# EAGLE board PCB v13 (EAGLE 9.7.0)
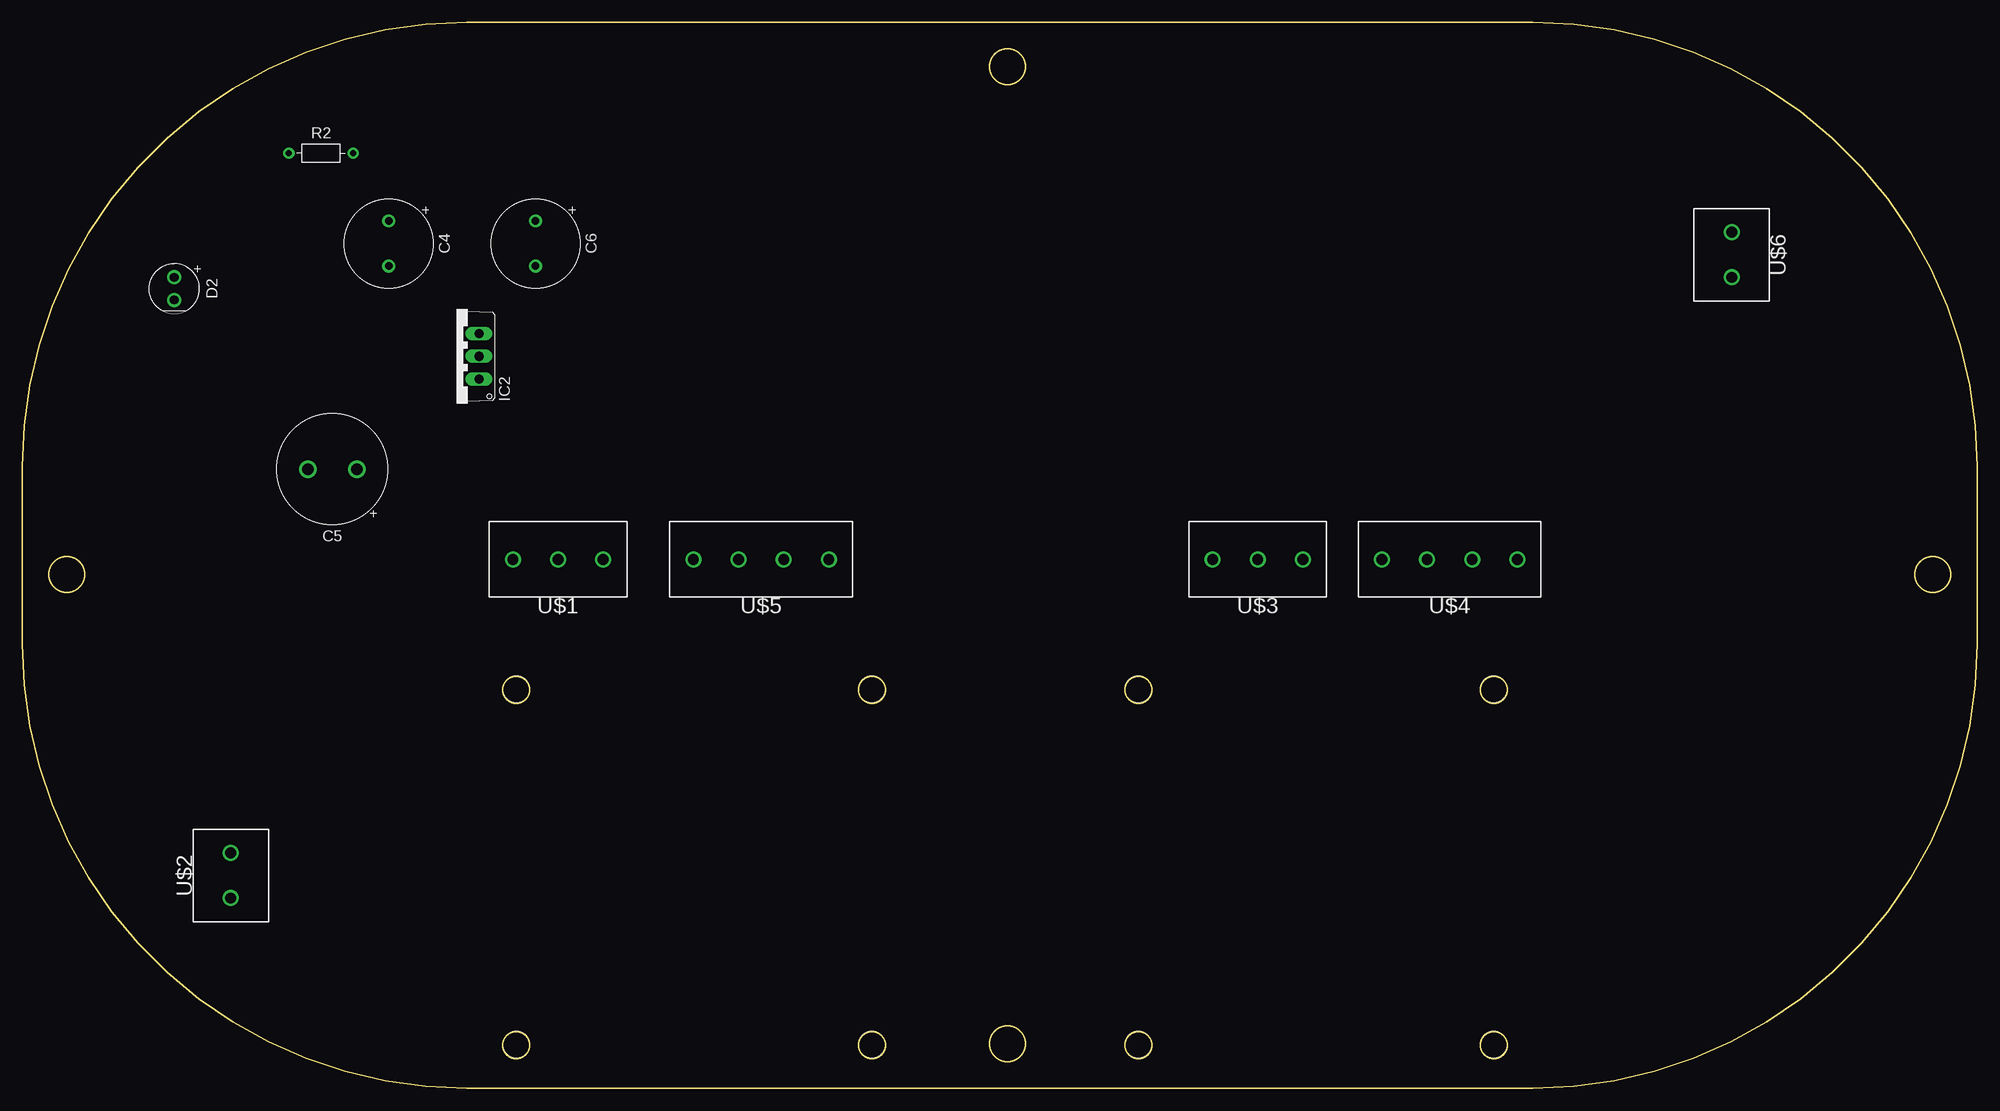
[diagram p0: board, top side]
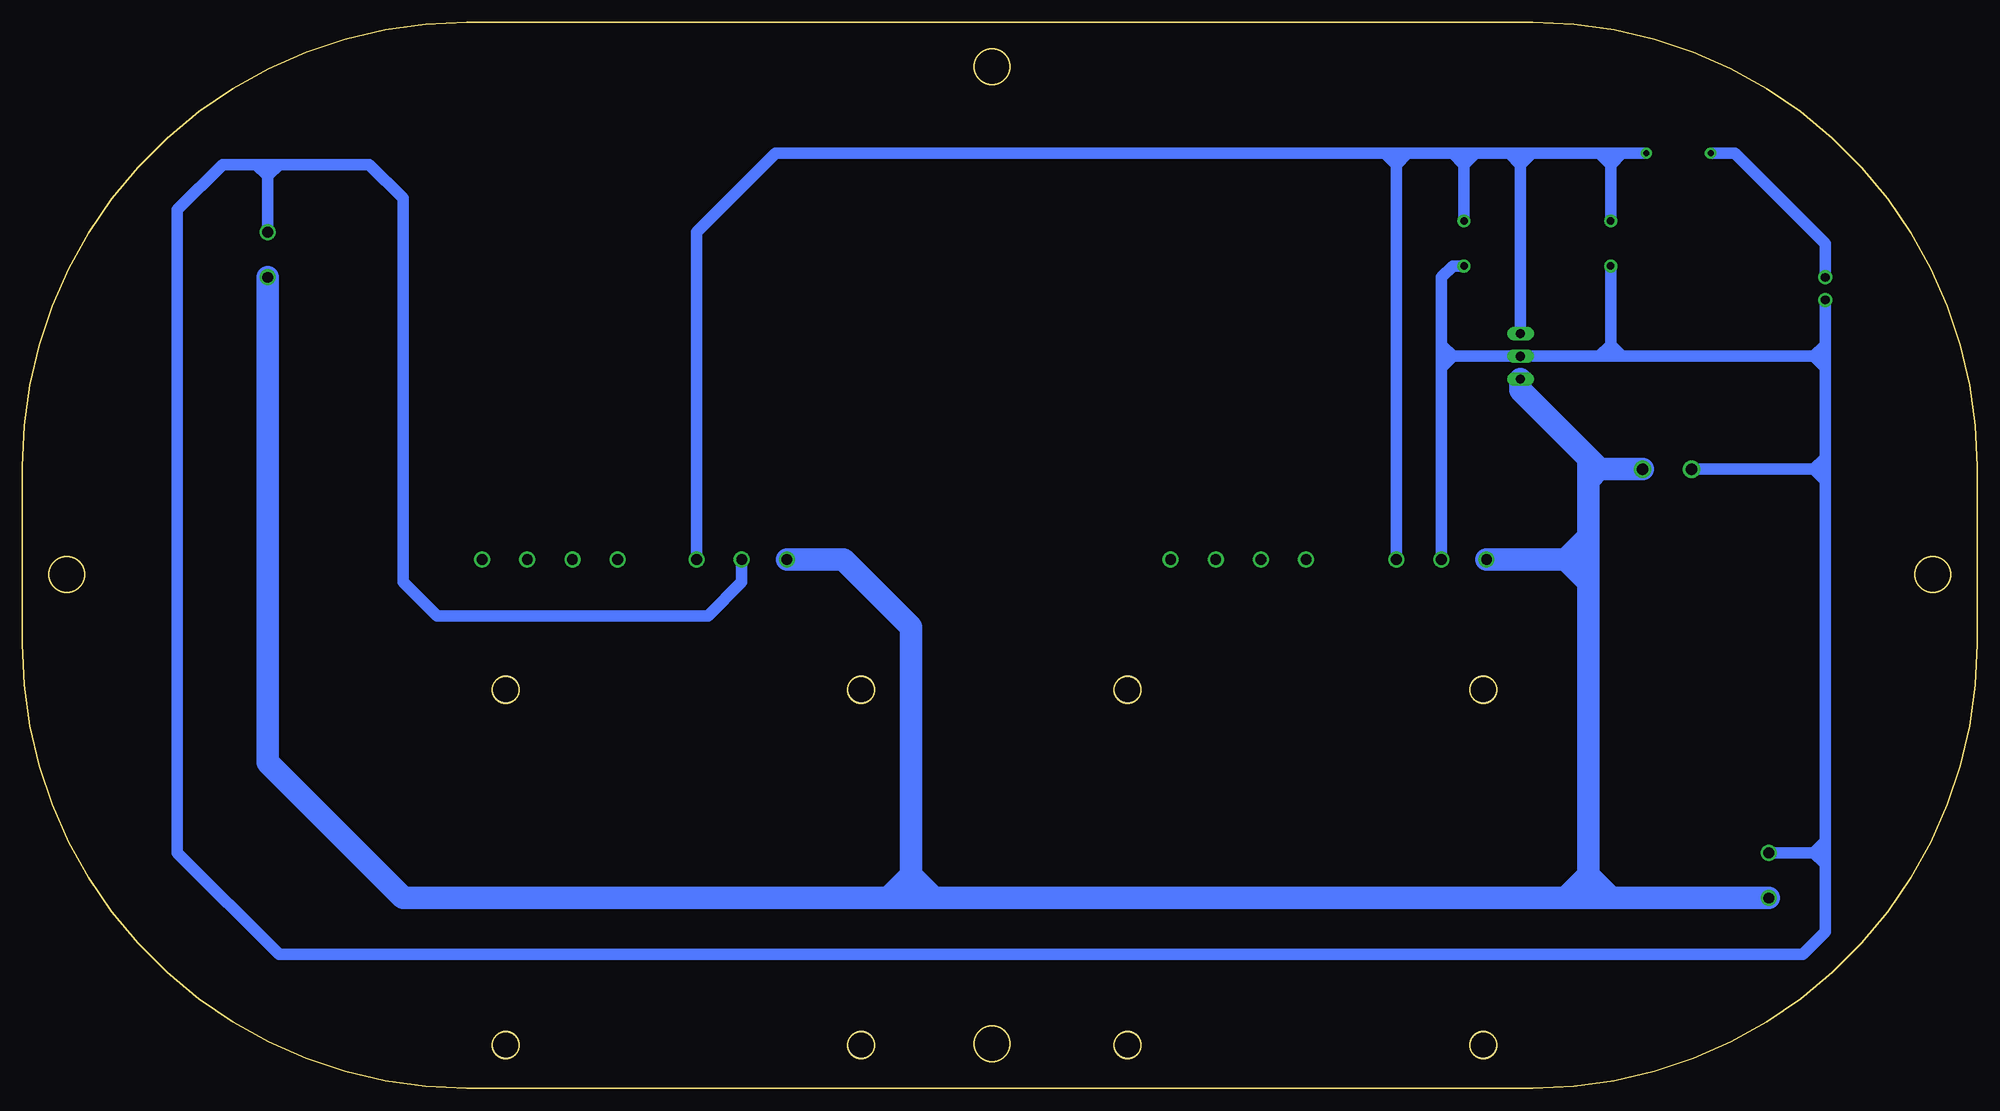
[diagram p1: board, bottom side, seen from below]

Size 220 x 120 mm. Coordinates in mm from the lower left corner, seen from the top.
Outline: 50,120 arc90 0,70 0,50 arc90 50,0 170,0 arc90 220,50 220,70 arc90 170,120 50,120
Outline: circle at 165.6,44.85 radius 1.5
Outline: circle at 125.6,4.85 radius 1.5
Outline: circle at 165.6,4.85 radius 1.5
Outline: circle at 95.6,4.85 radius 1.5
Outline: circle at 110.87,115 radius 2
Outline: circle at 55.6,4.85 radius 1.5
Outline: circle at 55.6,44.85 radius 1.5
Outline: circle at 215,57.85 radius 2
Outline: circle at 95.6,44.85 radius 1.5
Outline: circle at 5,57.85 radius 2
Outline: circle at 110.87,5 radius 2
Outline: circle at 125.6,44.85 radius 1.5
Copper layers (1*16): Top / Bottom
Stack-up Default Layer Stack: Top User Defined 0.035mm / Dielectric-1 User Defined 1.5mm / Bottom User Defined 0.035mm
Design rules "default": minimum track width 6mil, minimum drill 0.35mm, track to track 6mil, track to pad 6mil, pad to pad 6mil, via to via 6mil, smd to smd 6mil, copper to edge 40mil, drill to drill 6mil, minimum pad ring 10mil, minimum via ring 8mil, stop-mask expansion 4mil, vias tented up to drill 0mil, thermal gap 10mil
Holes 4 mm at 110.84,115.03 5.05,57.88 110.84,5.05 214.98,57.88
Holes 3 mm at 165.58,44.93 165.58,4.93 125.57,4.93 125.57,44.93 95.6,44.93 95.6,4.93 55.6,4.93 55.6,44.93

## Footprints (pad centres in the part's own frame; a part is rotated, then mirrored left to right if it is on the bottom)
CAPPRD508W65D1000H1100B = drill 0.85 pad 1.45: 1 -2.54,0; 2 2.54,0
CAPPRD550W110D1250H2500B = drill 1.3 pad 1.95: 1 -2.75,0; 2 2.75,0
LEDRD254W60D565H860B_O = drill 0.981 pad 1.581: 1 -1.27,0; 2 1.27,0
TO220V = drill 1.016 long: 1 -2.54,-2.54; 2 0,-2.54; 3 2.54,-2.54
RESAD724W46L381D178B = drill 0.66 pad 1.26: 1 -3.62,0; 2 3.62,0
TERMBLK_508-3N = drill 1.2: 1 0,0; 2 5.08,0; 3 10.16,0
TERMBLK_508-2N = drill 1.2: 1 0,0; 2 5.08,0
TERMBLK_508-4N = drill 1.2: 1 0,0; 2 5.08,0; 3 10.16,0; 4 15.24,0

## Placement (x,y rotation side)
C4  0.1uF  [CAPPRD508W65D1000H1100B]  41.24,95.1 270 top
C5  0.33uF  [CAPPRD550W110D1250H2500B]  34.89,69.7 180 top
C6  0.1uF  [CAPPRD508W65D1000H1100B]  57.75,95.1 270 top
D2  LED_ORANGE  [LEDRD254W60D565H860B_O]  17.11,90.02 270 top
IC2  7805TV  [TO220V]  48.86,82.4 90 top
R2  330  [RESAD724W46L381D178B]  33.62,105.26 0 top
U$1  2828XX-3282837-3  [TERMBLK_508-3N]  55.21,59.54 0 top
U$2  2828XX-2282837-2  [TERMBLK_508-2N]  23.46,26.52 270 top
U$3  2828XX-3282837-3  [TERMBLK_508-3N]  133.95,59.54 0 top
U$4  2828XX-4282837-4  [TERMBLK_508-4N]  153,59.54 0 top
U$5  2828XX-4282837-4  [TERMBLK_508-4N]  75.53,59.54 0 top
U$6  2828XX-2282837-2  [TERMBLK_508-2N]  192.37,91.29 90 top

## Library data of the parts
C4-C6 = Capacitor; CATEGORY: Capacitor
D2 = Tinkercad; CATEGORY: Opto-Electronic; SUB-CATEGORY: LED
IC2 = linear
R2 = Resistor; CATEGORY: Resistor; SUB-CATEGORY: Fixed
U$1 U$3 = Connector; CATEGORY: Connector; DESCRIPTION: TERM BLK 3P SIDE ENT 5.08mm PCB; MANUFACTURER: TE Connectivity; MPN: 282837-3; OPERATING_TEMPERATURE: -40°C to +105°C; PART_STATUS: Active; ROHS_COMPLIANCE: RoHS Compliant; SERIES: 282837; SUBCATEGORY: Terminal Block; TYPE: Side Wire Entry
U$2 = Connector; CATEGORY: Connector; DESCRIPTION: 2 Position Wire to Board Terminal Block Horizontal with Board 5.08 mm Through Hole; MANUFACTURER: TE Connectivity; MPN: 282837-2; OPERATING_TEMPERATURE: -40°C to +105°C; PART_STATUS: ACTIVE; ROHS_COMPLIANCE: RoHS Compliant; SERIES: 282837; SPICEPREFIX: B; SUBCATEGORY: Terminal Block; TYPE: Side Wire Entry
U$4 U$5 = Connector; CATEGORY: Connector; DESCRIPTION: TERM BLK 4P SIDE ENT 5.08mm PCB; MANUFACTURER: TE Connectivity; MPN: 282837-4; OPERATING_TEMPERATURE: 40°C to +105°C; PART_STATUS: Active; ROHS_COMPLIANCE: RoHS Compliant; SERIES: 283737; SUBCATEGORY: Terminal Block; TYPE: Side Wire Entry
U$6 = Connector; CATEGORY: Connector; DESCRIPTION: 2 Position Wire to Board Terminal Block Horizontal with Board 5.08 mm Through Hole; MANUFACTURER: TE Connectivity; MPN: 282837-2; OPERATING_TEMPERATURE: -40°C to +105°C; PART_STATUS: ACTIVE; ROHS_COMPLIANCE: RoHS Compliant; SERIES: 282837; SUBCATEGORY: Terminal Block; TYPE: Side Wire Entry

## Nets
+5V: C4.1 C6.1 IC2.3 R2.2 U$1.3 U$3.3
+12V: C5.1 IC2.1 U$1.1 U$2.2 U$3.1 U$6.1
GND: C4.2 C5.2 C6.2 D2.2 IC2.2 U$1.2 U$2.1 U$3.2 U$6.2
IN1_1: U$4.1
IN1_2: U$5.1
IN2_1: U$4.2
IN2_2: U$5.2
IN3_1: U$4.3
IN3_2: U$5.3
IN4_1: U$4.4
IN4_2: U$5.4
N$1: D2.1 R2.1

## Tracks (layer width: path | path; a pad name or v marks a point on that pad's centre or on a via)
+5V
  Bottom 1.27: R2.2 39.97,105.26 | 39.97,105.26 42.51,105.26 | 56.48,105.26 52.67,105.26 | 52.67,105.26 51.4,105.26 | 51.4,105.26 50.13,105.26 | 50.13,105.26 42.51,105.26 | 56.48,105.26 57.75,103.99 | C4.1 41.24,103.99 | 39.97,105.26 41.24,103.99 | 42.51,105.26 41.24,103.99 | IC2.3 51.4,103.99 | 51.4,103.99 51.4,105.26 | 50.13,105.26 51.4,103.99 | 52.67,105.26 51.4,103.99 | U$1.3 65.37,103.99 | 65.37,103.99 65.37,105.26 | 59.02,105.26 56.48,105.26 | 57.75,103.99 59.02,105.26 | C6.1 57.75,103.99 | U$3.3 144.11,96.37 135.22,105.26 66.64,105.26 | 66.64,105.26 65.37,105.26 | 65.37,105.26 64.1,105.26 | 64.1,105.26 59.02,105.26 | 64.1,105.26 65.37,103.99 | 66.64,105.26 65.37,103.99
+12V
  Bottom 2.54: 43.78,62.08 43.78,59.54 | 43.78,59.54 43.78,57 | 43.78,57 43.78,23.98 | 43.78,23.98 43.78,21.44 | 43.78,59.54 46.32,59.54 | U$1.1 46.32,59.54 | 46.32,59.54 43.78,62.08 | 46.32,59.54 43.78,57 | C5.1 42.51,69.7 | 42.51,69.7 43.78,69.7 | 122.52,21.44 119.98,21.44 | 119.98,21.44 117.44,21.44 | 117.44,21.44 46.32,21.44 | 46.32,21.44 43.78,21.44 | 43.78,21.44 41.24,21.44 | 41.24,21.44 U$2.2 | 41.24,21.44 43.78,23.98 | 46.32,21.44 43.78,23.98 | 43.78,62.08 43.78,68.43 | 43.78,68.43 43.78,69.7 | 43.78,69.7 43.78,70.97 | 43.78,70.97 51.4,78.59 IC2.1 | 43.78,70.97 42.51,69.7 | 42.51,69.7 43.78,68.43 | U$3.1 127.6,59.54 119.98,51.92 119.98,23.98 | 119.98,23.98 119.98,21.44 | 117.44,21.44 119.98,23.98 | 122.52,21.44 119.98,23.98 | 122.52,21.44 177.13,21.44 192.37,36.68 U$6.1
GND
  Bottom 1.27: 17.11,81.13 17.11,70.97 | 17.11,70.97 17.11,69.7 | 42.51,82.4 IC2.2 59.02,82.4 | 42.51,82.4 39.97,82.4 | 39.97,82.4 18.38,82.4 | 17.11,83.67 18.38,82.4 | 18.38,82.4 17.11,81.13 | 17.11,83.67 17.11,81.13 | C4.2 41.24,83.67 | 41.24,83.67 39.97,82.4 | 41.24,83.67 42.51,82.4 | C5.2 18.38,69.7 | 59.02,82.4 60.29,82.4 | 60.29,82.4 60.29,81.13 | 60.29,81.13 U$1.2 | 60.29,82.4 60.29,83.67 | 59.02,82.4 60.29,83.67 | 60.29,81.13 59.02,82.4 | C6.2 59.02,92.56 60.29,91.29 60.29,83.67 | U$3.2 139.03,57 142.84,53.19 173.32,53.19 177.13,57 177.13,100.18 180.94,103.99 191.1,103.99 | 191.1,103.99 192.37,103.99 | 192.37,103.99 193.64,103.99 | 193.64,103.99 197.45,103.99 202.53,98.91 202.53,26.52 191.1,15.09 19.65,15.09 17.11,17.63 17.11,25.25 | U$6.2 192.37,102.72 | 192.37,102.72 192.37,103.99 | 191.1,103.99 192.37,102.72 | 193.64,103.99 192.37,102.72 | 17.11,27.79 17.11,68.43 | 17.11,68.43 17.11,69.7 | U$2.1 18.38,26.52 | 18.38,26.52 17.11,27.79 | 18.38,26.52 17.11,25.25 | 17.11,27.79 17.11,25.25 | D2.2 17.11,83.67 | 18.38,69.7 17.11,69.7 | 17.11,70.97 18.38,69.7 | 17.11,68.43 18.38,69.7
N$1
  Bottom 1.27: D2.1 17.11,95.1 27.27,105.26 R2.1